# EAGLE board mini-bridge (EAGLE 5.07)
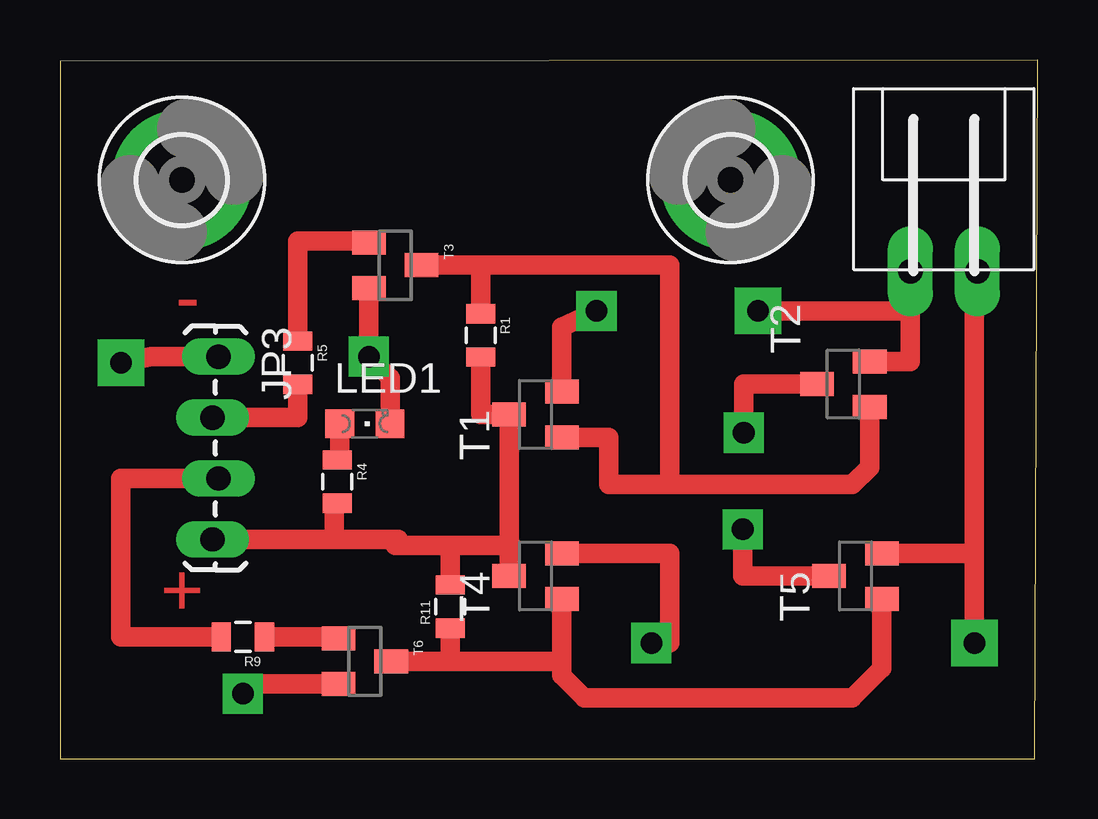
[diagram p0: board, top side]
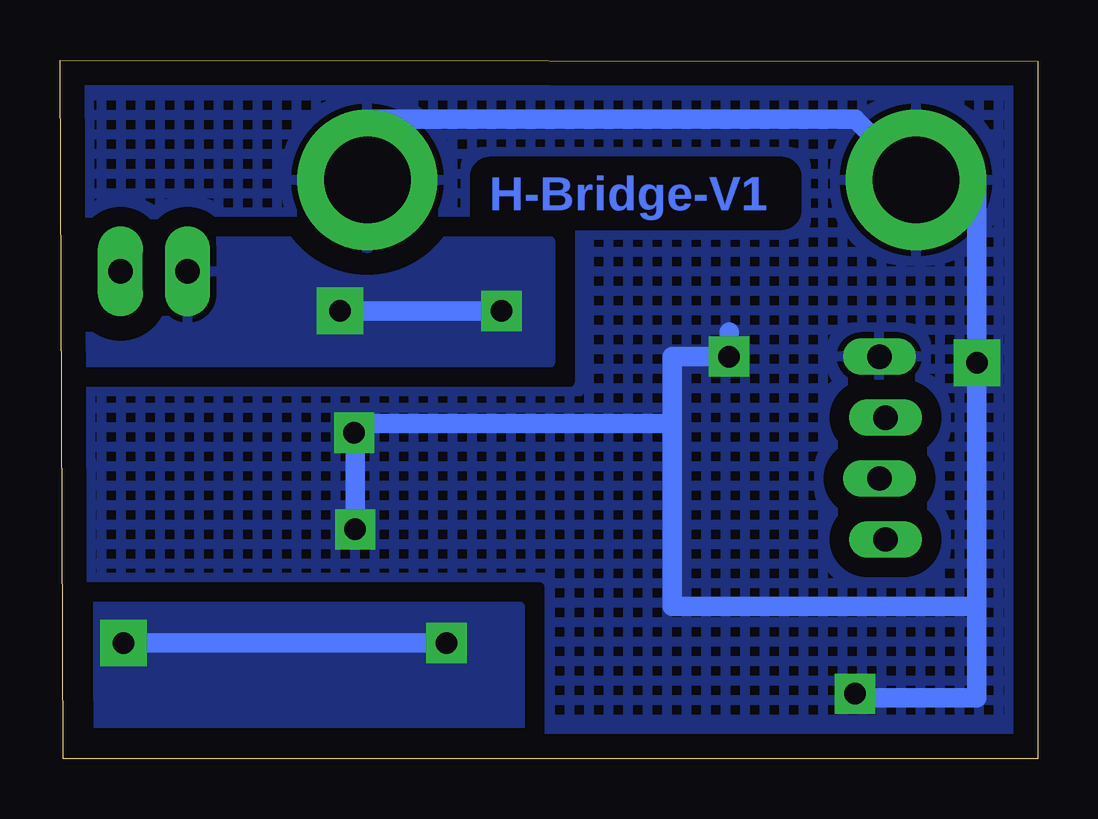
[diagram p1: board, bottom side, seen from below]

Size 40.75 x 29.13 mm. Coordinates in mm from the lower left corner, seen from the top.
Outline: 0,0 40.62,0 40.75,29.13 0,29.08 0,0
Copper layers (1*16): Top 0.035mm / dielectric 1.5mm / Bottom 0.035mm
Design rules "default": minimum track width 10mil, minimum drill 24mil, track to track 8mil, track to pad 8mil, pad to pad 8mil, via to via 8mil, smd to smd 8mil, copper to edge 40mil, drill to drill 8mil, minimum pad ring 10mil, minimum via ring 8mil, stop-mask expansion 4mil, vias tented up to drill 0mil, thermal gap 10mil

## Footprints (pad centres in the part's own frame; a part is rotated, then mirrored left to right if it is on the bottom)
3,6-PAD = drill 3.6 pad 5.842 round: B3,6 0,0
XH-1X2-LONG-LOCK = drill 1.016 pad 1.88 long: 1 -1.397,0; 2 1.397,0
1X04_LOCK_LONGPADS = drill 1.016 long: 1 0,0; 2 2.54,-0.254; 3 5.08,0; 4 7.62,-0.254
CHIPLED_0805 = smd 1.2 x 1.2: A 0,-1.05; C 0,1.05
0805 = smd 0.8 x 1.2: 1 -0.9,0; 2 0.9,0
SOT23-BEC = smd 1 x 1.4: B -0.95,-1.1; C 0,1.1; E 0.95,-1.1
SOT23 = smd 1 x 1.4: 1 -0.95,-1.1; 2 0.95,-1.1; 3 0,1.1

## Placement (x,y rotation side)
H2  MOUNT-PAD-ROUND3.6  [3,6-PAD]  27.94,24.13 90 top
H3  MOUNT-PAD-ROUND3.6  [3,6-PAD]  5.08,24.13 0 top
JP1  MOTOR  [XH-1X2-LONG-LOCK]  36.83,20.32 0 top
JP3  Power  [1X04_LOCK_LONGPADS]  6.6,16.76 270 top
LED1  RED  [CHIPLED_0805]  12.7,13.97 270 top
R1  1k  [0805]  17.53,17.65 270 top
R4  500  [0805]  11.56,11.56 270 top
R5  1k  [0805]  9.91,16.51 270 top
R9  1k  [0805]  7.62,5.08 180 top
R11  1k  [0805]  16.26,6.35 90 top
T1  8050  [SOT23-BEC]  19.81,14.35 90 top
T2  8550  [SOT23-BEC]  32.64,15.62 90 top
T3  9013  [SOT23]  13.97,20.57 270 top
T4  8050  [SOT23-BEC]  19.81,7.62 90 top
T5  8550  [SOT23-BEC]  33.15,7.62 90 top
T6  9013  [SOT23]  12.7,4.06 270 top

## Library data of the parts
H2 H3 = holes
JP1 LED1 R4 R5 R9 R11 T1-T6 = digital-toy
JP3 R1 = SparkFun

## Nets
GND: H2.B3,6 H3.B3,6 JP3.1 LED1.C T2.C T3.2 T5.C T6.2
N$1: LED1.A R4.1
N$2: JP1.1 T1.E T2.E
N$3: R9.1 T6.1
N$6: R11.1 T4.B T5.B T6.3
N$7: R1.1 T1.B T2.B T3.3
N$10: R5.1 T3.1
N$17: JP1.2 T4.E T5.E
PWM1: JP3.3 R9.2
PWM2: JP3.2 R5.2
VCC: JP3.4 R1.2 R4.2 R11.2 T1.C T4.C

## Tracks (layer width: path | path; a pad name or v marks a point on that pad's centre or on a via)
GND  (via drill 0.9 pad 1.68, 0.9 pad 1.93)
  Top 0.813: T3.2 v12.87,16.76 13.75,15.88 LED1.C | JP3.1 3.81,16.76 v2.54,16.51 | T5.C 28.45,7.62 v28.45,9.57 | T6.2 7.62,3.11 v7.62,2.71 | T2.C 28.49,15.62 v28.49,13.59
  Bottom 0.813: 27.94,13.97 v28.49,13.59 | H2.B3,6 27.94,26.67 7.62,26.67 H3.B3,6 2.54,24.13 v2.54,16.51 | 2.54,6.35 2.54,2.54 7.62,2.54 v7.62,2.71 | 2.54,6.35 v2.54,16.51 | v12.87,16.76 12.87,17.78 | v2.54,16.51 2.54,16.76 | v12.87,16.76 12.87,16.51 | v12.87,16.76 15.24,16.76 15.24,13.97 | 15.24,13.97 15.24,6.35 2.54,6.35 | 15.24,13.97 27.94,13.97 | 27.94,13.97 28.45,13.97 v28.45,9.57
  pour Bottom (isolate 0.813, rank 6, hatched): -3.81,31.75 45.72,31.75 45.72,-3.81 -3.81,-3.81
N$1
  Top 0.813: R4.1 11.65,12.46 LED1.A
N$2  (via drill 0.9 pad 1.68, 0.9 pad 1.93)
  Top 0.813: T1.E 20.91,18 v22.35,18.67 | v29.08,18.67 35.43,18.67 | 35.43,18.67 JP1.1 | T2.E 35.43,16.57 35.43,18.67
  Bottom 0.813: v22.35,18.67 v29.08,18.67
  pour Bottom (isolate 1.016, rank 2): 20.32,21.59 20.32,16.51 49.53,16.51 49.53,21.59
N$3
  Top 0.813: T6.1 11.5,5.08 R9.1
N$6
  Top 0.813: T5.B 34.25,3.77 33.02,2.54 21.84,2.54 20.91,3.47 20.91,3.81 | T6.3 16.26,4.06 | 20.91,3.81 T4.B | 16.26,4.06 R11.1 | 16.26,4.06 20.66,4.06 20.91,3.81
N$7
  Top 0.813: T2.B 33.74,12.15 33.02,11.43 25.4,11.43 | 25.4,11.43 22.86,11.43 22.86,13.4 T1.B | 17.53,20.57 T3.3 | R1.1 17.53,20.57 | 17.53,20.57 25.4,20.57 25.4,11.43
N$10
  Top 0.813: R5.1 9.91,21.59 12.8,21.59 T3.1
N$17  (via drill 0.9 pad 1.68, 0.9 pad 1.93)
  Top 0.813: T4.E 25.4,8.57 25.4,4.83 v24.64,4.83 | 38.1,8.57 T5.E | v38.1,4.83 38.1,8.57 | JP1.2 38.1,20.32 38.1,8.57
  Bottom 0.813: v24.64,4.83 v38.1,4.83
  pour Bottom (isolate 1.27, rank 2): 52.07,6.35 21.59,6.35 21.59,1.27 52.07,1.27
PWM1
  Top 0.813: JP3.3 2.54,11.68 2.54,5.08 R9.2
PWM2
  Top 0.813: JP3.2 9.91,14.22 R5.2
VCC
  Top 0.813: 16.26,8.89 R11.2 | JP3.4 11.43,9.14 | 11.43,9.14 13.97,9.14 | 13.97,9.14 14.1,9.14 | 16.26,8.89 13.97,8.89 13.97,9.14 | R1.2 17.53,14.35 T1.C 18.71,8.89 | 16.26,8.89 18.71,8.89 | 18.71,8.89 T4.C | R4.2 11.43,10.66 11.43,9.14

## Text on the board
Top: - | +
Bottom: H-Bridge-V1